# EAGLE board FINISHED_SCHEMATIC (EAGLE 9.5.2)
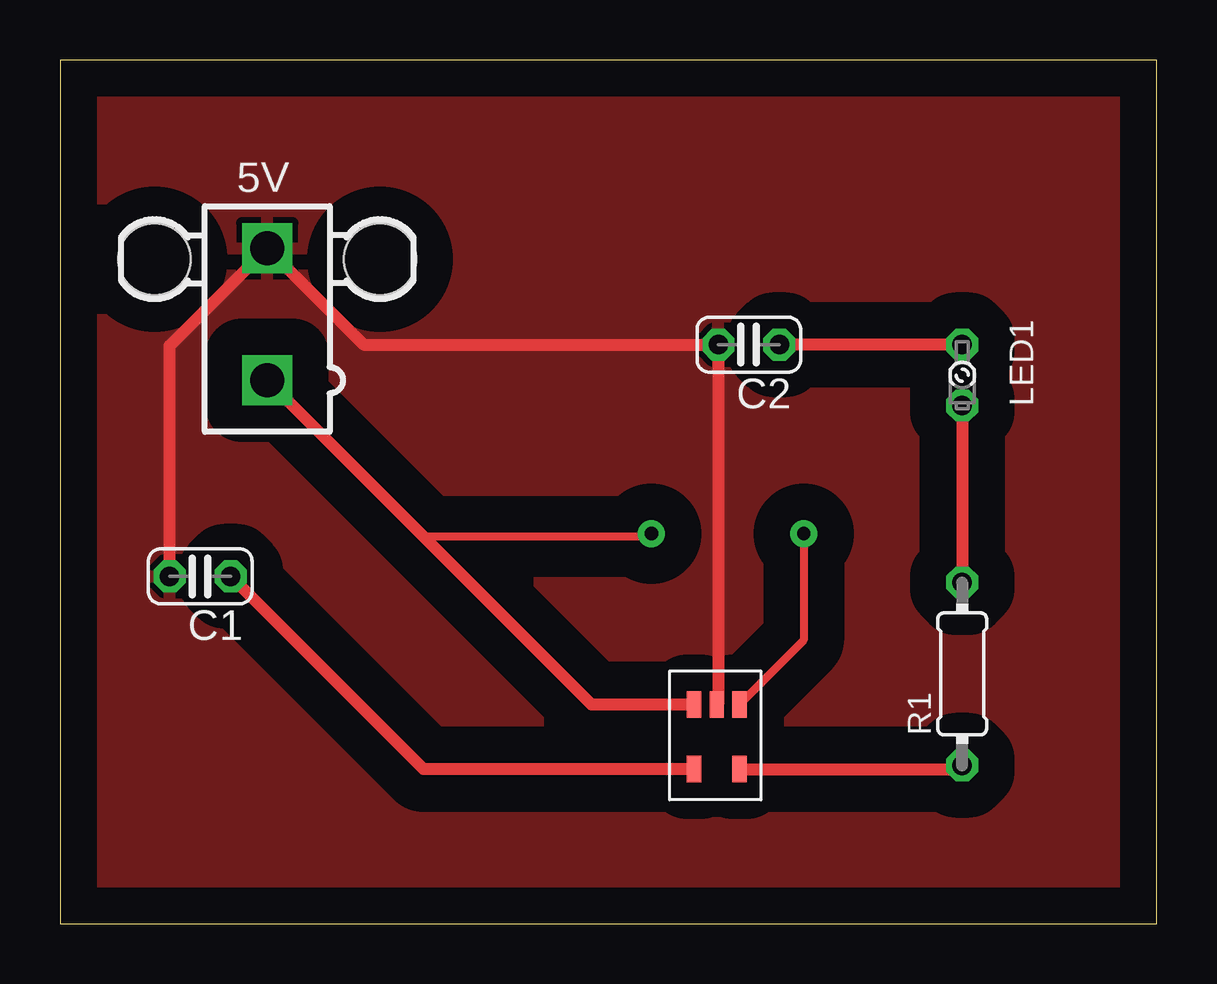
[diagram p0: board, top side]
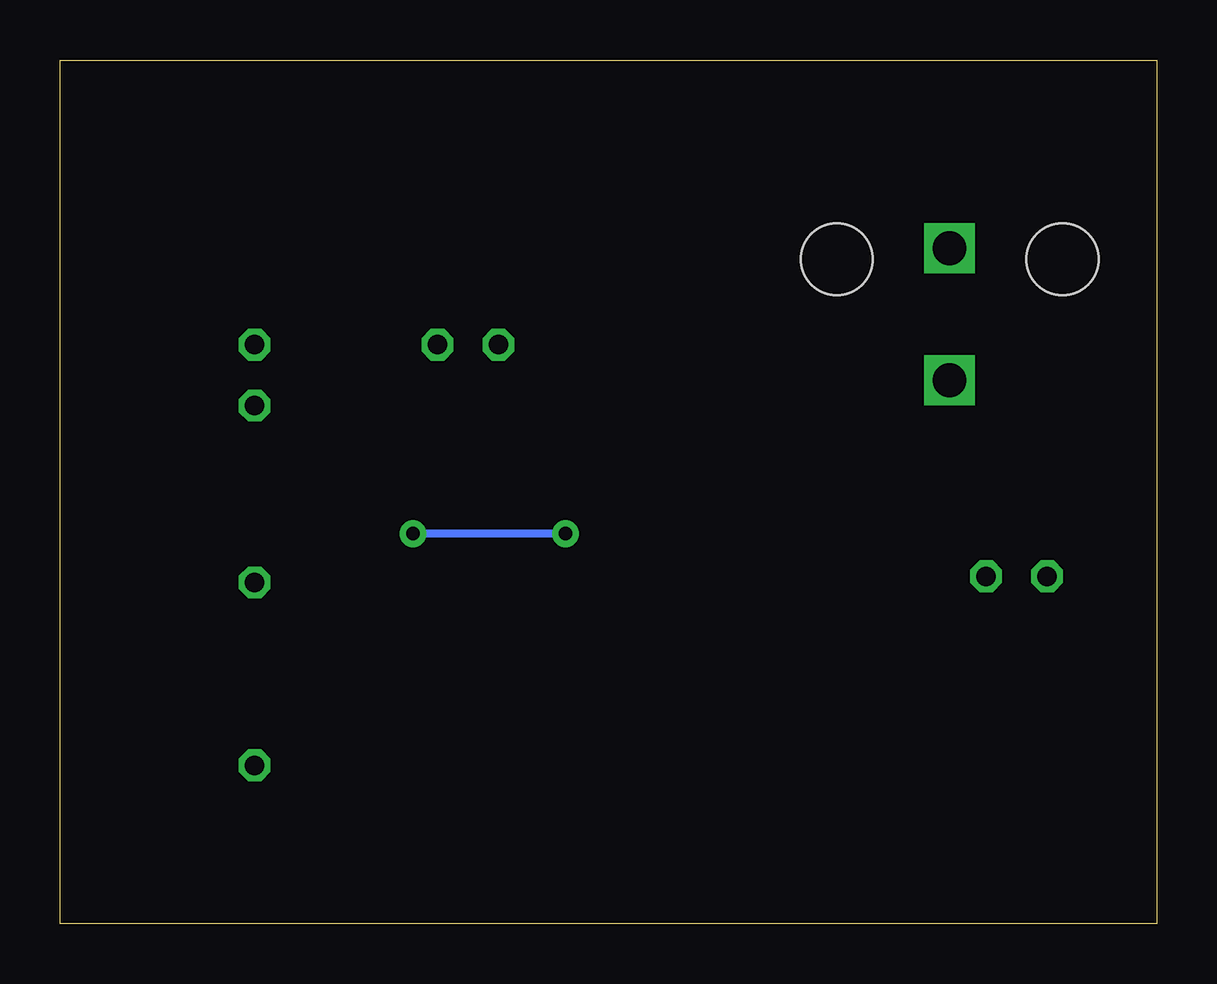
[diagram p1: board, bottom side, seen from below]

Size 45.7 x 35.99 mm. Coordinates in mm from the lower left corner, seen from the top.
Outline: 0,0 45.7,0 45.7,35.99 0,35.99 0,0
Copper layers (1*16): Top 0.035mm / dielectric 1.5mm / Bottom 0.035mm
Design rules "MWSEagleDesignRules3": minimum track width 13mil, minimum drill 22mil, track to track 8.5mil, track to pad 8.5mil, pad to pad 8.5mil, via to via 8.5mil, smd to smd 8mil, copper to edge 40mil, drill to drill 8mil, minimum pad ring 10mil, minimum via ring 8mil, stop-mask expansion 4mil, vias tented up to drill 0mil, thermal gap 10mil

## Footprints (pad centres in the part's own frame; a part is rotated, then mirrored left to right if it is on the bottom)
5566-2 = drill 1.4 square: 1 0,-2.75; 2 0,2.75 | hole 3: 4.7,2.29; -4.7,2.29
C025-024X044 = drill 0.813 octagon: 1 -1.27,0; 2 1.27,0
LSU260 = drill 0.813 octagon: A -1.27,0; K 1.27,0
0204/7 = drill 0.813 octagon: 1 -3.81,0; 2 3.81,0
TPS799 = smd 1.1 x 0.6: EN 0,0; GND 0,0.95; IN 0,1.9; NR 2.7,0; OUT 2.7,1.9

## Placement (x,y rotation side)
5V  5566-2  [5566-2]  8.64,25.4 0 top
C1  .1µF  [C025-024X044]  5.84,14.48 180 top
C2  2.2µF  [C025-024X044]  28.7,24.13 180 top
LED1  [LSU260]  37.59,22.86 90 top
R1  100Ω  [0204/7]  37.59,10.41 90 top
U$2  TPS799  [TPS799]  26.42,9.14 270 top

## Library data of the parts
5V = con-molex; MF: MOLEX; OC_FARNELL: 1822072; OC_NEWARK: unknown
C1 C2 = rcl; SPICEPREFIX: C
LED1 = led
R1 = rcl; SPICEPREFIX: R
U$2 = TPS799

## Nets
GND: 5V.2 C1.2 C2.2 U$2.GND
N$1: C1.1 U$2.NR
N$2: C2.1 LED1.K
N$3: LED1.A R1.2
N$4: R1.1 U$2.OUT
N$5: 5V.1 U$2.EN U$2.IN

## Tracks (layer width: path | path; a pad name or v marks a point on that pad's centre or on a via)
GND
  Top 0.508: C1.2 4.57,24.09 5V.2 12.66,24.13 C2.2 27.43,9.21 U$2.GND
  pour Top (isolate 1.524): 0,36.07 45.72,36.07 45.72,0 0,0
N$1
  Top 0.508: U$2.NR 15.15,6.44 C1.1
N$2
  Top 0.508: LED1.K C2.1
N$3
  Top 0.508: LED1.A R1.2
N$4
  Top 0.508: U$2.OUT 37.43,6.44 R1.1
N$5  (via drill 0.56)
  Top 0.33: 15.13,16.15 24.53,16.15 v24.64,16.26 | v30.99,16.26 30.99,11.82 U$2.IN
  Top 0.508: 5V.1 15.13,16.15 22.14,9.14 U$2.EN
  Bottom 0.33: v24.64,16.26 v30.99,16.26